# Altium PCB GyroBoard.PcbDoc
Units mil, origin at the board's own origin, x right, y up, seen from the top; angles counter-clockwise.
Board outline 1040 x 955 mil, 2 copper layers (Top Layer, Bottom Layer); 45 components, 30 nets, 204 pads, 65 vias.
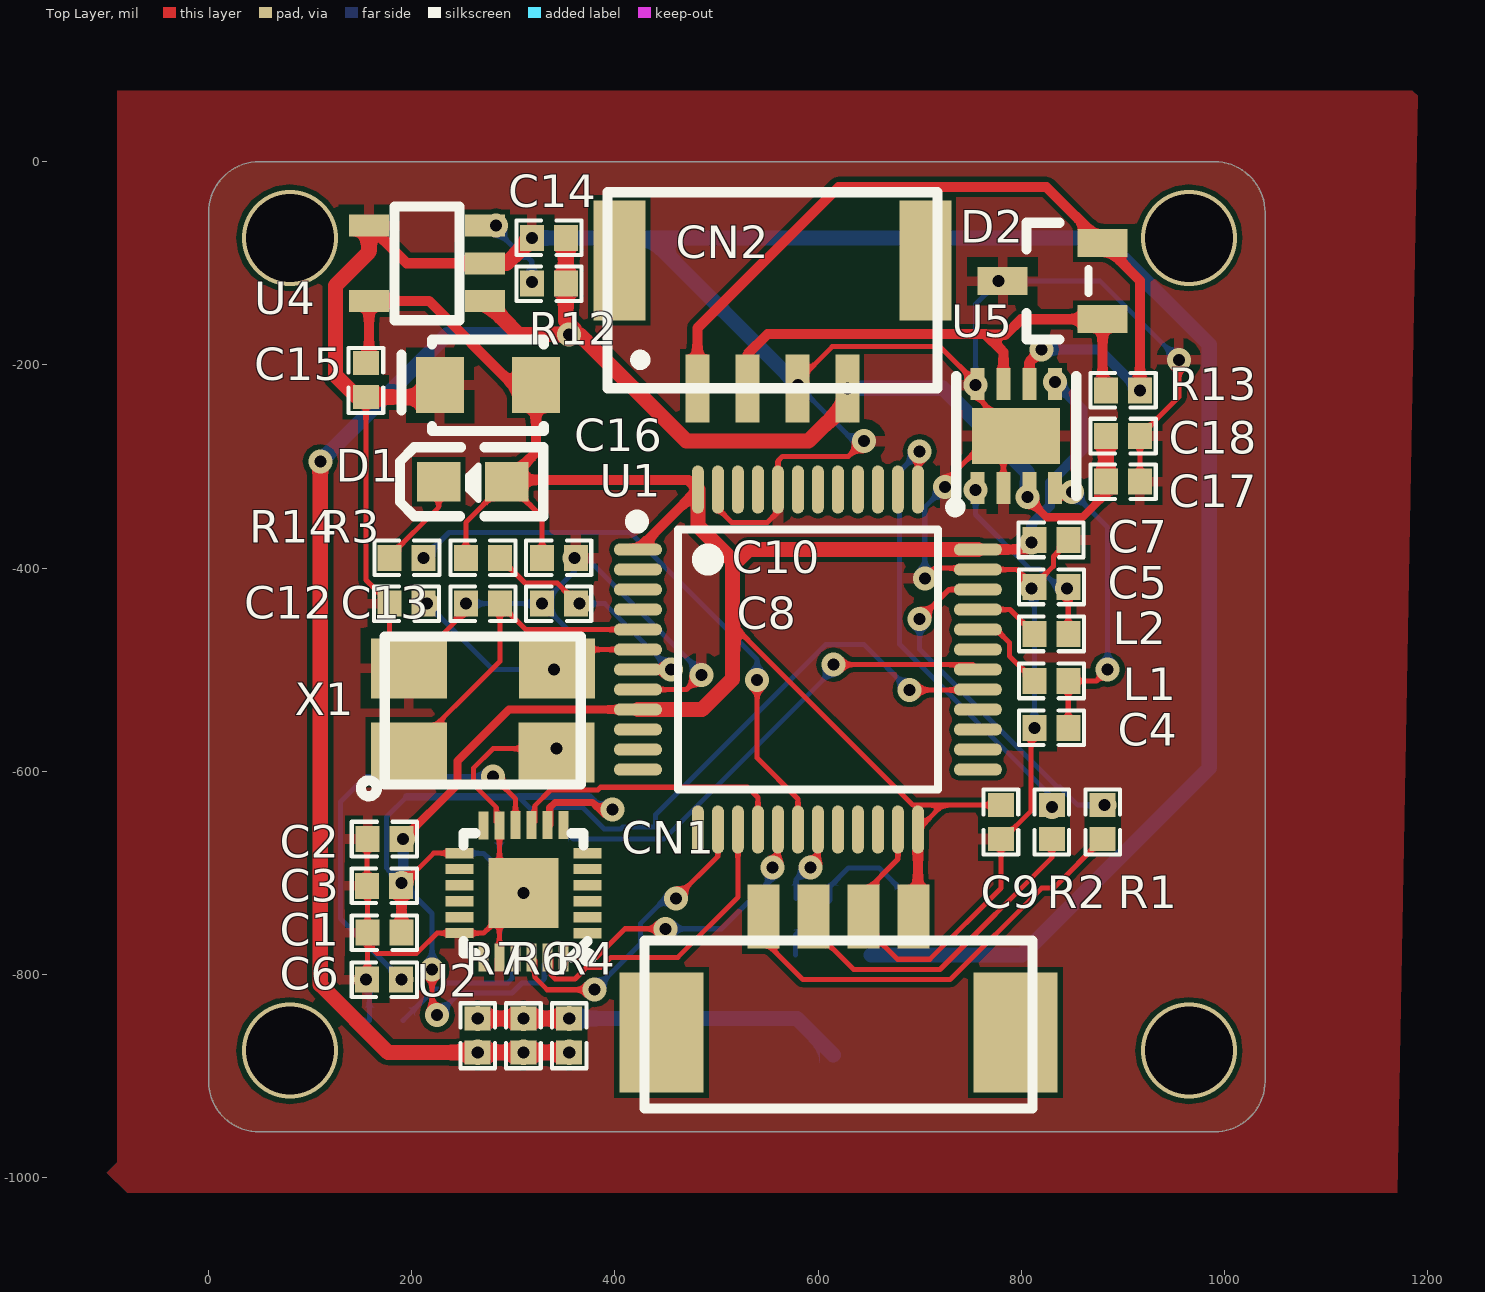
[diagram p0: Top Layer view]
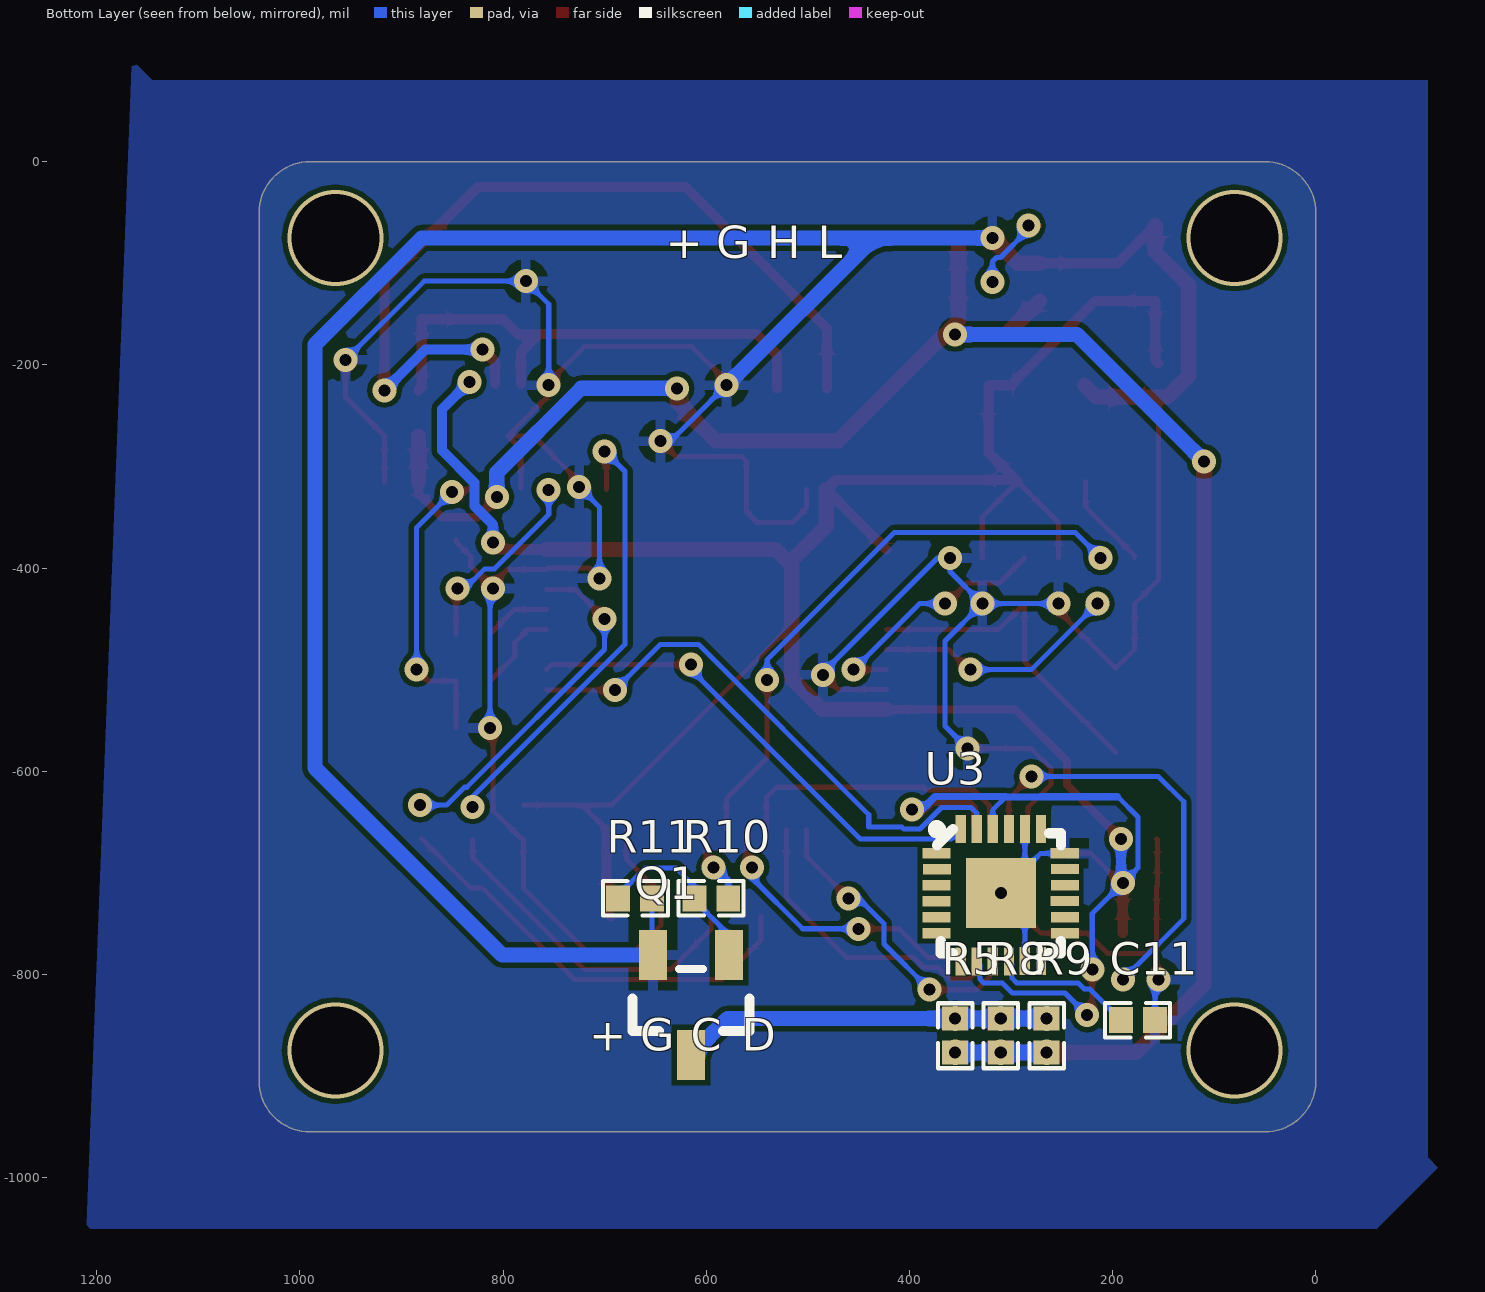
[diagram p1: Bottom Layer view, seen from below]

## Layer stack, top to bottom
Top Solder: solder mask 0.4, Solder Resist, Dk 3.5
Top Layer: signal copper 1.4
Dielectric 1: dielectric 12.6, FR-4, Dk 4.8
Bottom Layer: signal copper 1.4
Bottom Solder: solder mask 0.4, Solder Resist, Dk 3.5

## Board outline
0,-905 ccw(c50,-905) 50,-955 990,-955 ccw(c990,-905) 1040,-905 1040,-50 ccw(c990,-50) 990,0 50,0 ccw(c50,-50) 0,-50

## Design rules (kind name [scope] priority, off if disabled: settings)
Clearance [All] p1: gap=5 ignorepadtopadclearanceinfootprint=TRUE except(0: Arc-Text Arc-Hole Track-Text Track-Hole SMDPad-Text SMDPad-Hole THPad-Text THPad-Hole Via-Text Via-Hole Fill-Text Fill-Hole Poly-Text Poly-Hole Region-Text Region-Hole Text-Text Text-Hole)
ComponentClearance [All] p1: gap=5 collisioncheckmode=3 verticalgap=5 showdistances=FALSE
HoleSize [All] p1: absolutevalues=TRUE maxlimit=248.03 minlimit=7.87 maxpercent=80.000 minpercent=20.000
MinimumSolderMaskSliver [All] p1 off: minsoldermaskwidth=5
PolygonConnect [All] p1: connectstyle=Relief reliefconductorwidth=10 reliefentries=4 polygonreliefangle="90 Angle" airgapwidth=10
RoutingVias [All] p1: holewidth=11.81 width=23.62 viastyle="Through Hole" minholewidth=11.81 minwidth=23.62 maxholewidth=248.03 maxwidth=314.96
SilkToSilkClearance [All] p1 off: silktosilkclearance=10
SilkToSolderMaskClearance [IsPad] p1 off: minsilkscreentomaskgap=10 clearancetoexposedcopper=TRUE
SolderMaskExpansion [All] p1: expansion=4
Width [All] p1: maxlimit=50 minlimit=5 preferedwidth=5
25 further rules are at their usual default settings.

## Components (designator, comment, footprint, x,y, rotation, side; value= is the part's Value field where it differs from the comment)
C1 "105" 0402 173.3,-758.89 r0 top value=22pF
C2 "104" 0402 173.3,-666.67 r0 top value=22pF
C3 "104" 0402 172.7,-712.78 r180 top value=22pF
C4 "47pF" 0402 829.53,-557.32 r180 top value=22pF
C5 "47pF" 0402 829.53,-418.57 r180 top value=22pF
C6 "104" 0402 172.7,-805 r180 top value=22pF
C7 "104" 0402 829.53,-372.32 r0 top value=22pF
C8 "104" 0402 345,-435 r0 top value=22pF
C9 "104" 0402 780,-650 r270 top value=22pF
C10 "104" 0402 345,-390 r0 top value=22pF
C11 "104" 0402 175,-845 r180 bottom value=22pF
C12 "20pF" 0402 195,-435 r0 top value=22pF
C13 "20pF" 0402 270,-435 r180 top value=22pF
C14 "4.7uF" 0402 335,-75 r180 top value=22pF
C15 "104" 0402 155,-215 r90 top value=22pF
C16 "4.7uF" CAP-CASE-A_3216 275,-220 r0 top value=22pF
C17 "1uF" 0402 900,-315 r180 top value=22pF
C18 "104" 0402 900,-270 r180 top value=22pF
CN1 "53261-0471" 532610471 620,-800 r0 top
CN2 "A1257WR-S-4P" A1257WR-S-4P 555,-160 r180 top
D1 "LED_GREEN" LED-0603 260,-315 r0 top
D2 "SM712_C293966" SOT-23-3 830.8,-117.6 r90 top
L1 "CBG100505U310T" 0402 829.53,-511.07 r180 top value=300MA
L2 "CBG100505U310T" 0402 829.53,-464.82 r180 top value=300MA
Q1 "BSS138LT1G" SOT-23(SOT-23-3) 615,-830 r0 bottom
R1 "100R" 0402 880,-650 r270 top value=10K
R2 "100R" 0402 830,-650 r270 top value=10K
R3 "10K" 0402 270,-390 r180 top
R4 "270R" 0402 355,-860 r90 top value=10K
R5 "270R" 0402 355,-860 r90 bottom value=10K
R6 "270R" 0402 310,-860 r90 top value=10K
R7 "270R" 0402 265,-860 r90 top value=10K
R8 "270R" 0402 310,-860 r90 bottom value=10K
R9 "270R" 0402 265,-860 r90 bottom value=10K
R10 "120R" 0402 595,-725 r180 bottom value=10K
R11 "10K" 0402 670,-725 r0 bottom
R12 "4.7K" 0402 335,-120 r180 top value=10K
R13 "120R" 0402 900,-225 r180 top value=10K
R14 "200" 0402 195,-390 r180 top value=10K
U1 "STM32F103C6T7A" QFP-48_LSA9.2-LSB9.2-H1.6-PITCH0.5-TL 590,-490 r0 top
U2 "MPU6500" QFN24-EP 310.05,-718.05 r180 top
U3 "MPU6500" QFN24-EP 310.05,-721.95 r180 bottom
U4 "LP5907MFX-3.3/NOPB" SOT-23-5 215,-100 r90 top
U5 "MCP2562T-E/MF" DFN-8_EP_3X3MM 795,-270 r90 top
X1 "8MHz" SMD-5032_4P 270,-540 r0 top

## Footprints (in the part's own frame and the unit in brackets; to place one, negate y for a bottom-side part, rotate by r counter-clockwise, add the part's x,y. Pads: shape width x height; smd on the part's side, far side on the other; paste and mask are expansions set on the pad)
0402 [mm]
  rect 0.6x0.65 smd: 1(-0.424,0) 2(0.424,0)
  silkscreen extent -0.82,-0.43 0.81,0.43
532610471 [mm]
  rect 2.1x3 smd: 0(-4.425,-1.45) 0(4.425,-1.45)
  rect 0.8x1.6 smd: 1(-1.875,1.45) 2(-0.625,1.45) 3(0.625,1.45) 4(1.875,1.45)
  silkscreen extent -4.85,-3.35 4.85,0.85
A1257WR-S-4P [mm]
  rect 0.6x1.7 smd: 1(1.874,1.6) 2(0.625,1.6) 3(-0.625,1.6) 4(-1.875,1.6)
  rect 1.3x3 smd: 5(3.825,-1.6) 6(-3.825,-1.6)
  silkscreen extent -4.13,-3.3 4.13,1.6
CAP-CASE-A_3216 [mm]
  rect 1.2x1.4 smd: 1(-1.2,0) 2(1.2,0)
  silkscreen extent -2.16,-1.14 1.4,1.14
DFN-8_EP_3X3MM [mm]
  rect 0.8x0.35 smd: 1(-1.3,0.97) 2(-1.3,0.32) 3(-1.3,-0.33) 4(-1.3,-0.97) 5(1.3,-0.97) 6(1.3,-0.33) 7(1.3,0.32) 8(1.3,0.97)
  rect 1.4x2.2 smd: 9(0,0)
  silkscreen extent -1.9,-1.5 1.5,1.65
LED-0603 [mil]
  rect 43x39 smd: 1(33.5,0) 2(-33.5,0)
  silkscreen extent -72,-34 70,34
QFN24-EP [mil]
  rect 27.56x10 smd: 1(-63.05,41.35) 2(-62.95,25.55) 3(-63.05,9.85) 4(-63.05,-5.95) 5(-63.05,-21.75) 6(-63.05,-37.45) 13(63.05,-37.45) 14(63.05,-21.75) 15(62.95,-5.85) 16(63.05,9.85) 17(63.05,25.65) 18(62.95,41.25)
  rect 10x27.56 smd: 7(-39.35,-65.05) 8(-23.65,-65.05) 9(-7.85,-65.05) 10(7.95,-65.05) 11(23.65,-64.95) 12(39.45,-64.95) 19(39.45,65.05) 20(23.75,65.05) 21(7.95,65.05) 22(-7.85,65.05) 23(-23.65,65.05) 24(-39.35,65.05)
  rect 68.9x68.9 smd: 25(0.05,1.95)
  silkscreen extent -67,-57 59,69
QFP-48_LSA9.2-LSB9.2-H1.6-PITCH0.5-TL [mm]
  oval 1.2x0.3 smd: 1(-4.25,2.75) 2(-4.25,2.25) 3(-4.25,1.75) 4(-4.25,1.25) 5(-4.25,0.75) 6(-4.25,0.25) 7(-4.25,-0.25) 8(-4.25,-0.75) 9(-4.25,-1.25) 10(-4.25,-1.75) 11(-4.25,-2.25) 12(-4.25,-2.75) 25(4.25,-2.75) 26(4.25,-2.25) 27(4.25,-1.75) 28(4.25,-1.25) 29(4.25,-0.75) 30(4.25,-0.25) 31(4.25,0.25) 32(4.25,0.75) 33(4.25,1.25) 34(4.25,1.75) 35(4.25,2.25) 36(4.25,2.75)
  oval 0.3x1.2 smd: 13(-2.75,-4.25) 14(-2.25,-4.25) 15(-1.75,-4.25) 16(-1.25,-4.25) 17(-0.75,-4.25) 18(-0.25,-4.25) 19(0.25,-4.25) 20(0.75,-4.25) 21(1.25,-4.25) 22(1.75,-4.25) 23(2.25,-4.25) 24(2.75,-4.25) 37(2.75,4.25) 38(2.25,4.25) 39(1.75,4.25) 40(1.25,4.25) 41(0.75,4.25) 42(0.25,4.25) 43(-0.25,4.25) 44(-0.75,4.25) 45(-1.25,4.25) 46(-1.75,4.25) 47(-2.25,4.25) 48(-2.75,4.25)
  silkscreen extent -4.42,-3.25 3.25,3.6
SMD-5032_4P [mm]
  rect 1.9x1.5 smd: 1(-1.849,-1.05) 2(1.847,-1.05) 3(1.849,1.05) 4(-1.849,1.05)
  silkscreen extent -3.05,-2.15 2.45,1.85
SOT-23(SOT-23-3) [mm]
  rect 0.7x1.25 smd: 1(-0.95,-1.25) 2(0.95,-1.25) 3(0,1.25)
  silkscreen extent -1.46,-0.9 1.46,0.65
SOT-23-3 [mm]
  rect 0.7x1.25 smd: 1(-0.95,-1.25) 2(0.95,-1.25) 3(0,1.25)
  silkscreen extent -1.46,-0.9 1.46,0.65
SOT-23-5 [mil]
  rect 21.7x39.37 smd: 1(-37,-57) 2(0,-57) 3(37,-57) 4(37,57) 5(-37,57)
  silkscreen extent -56,-32 56,32

## Part data
C1 C2 C3 C4 C5 C6 C7 C8 C9 C10 C11 C12 C13 C14 C15 C16 C17 C18: library part Cap, "Capacitor", LatestRevisionDate=17-Jul-2002, LatestRevisionNote="Re-released for DXP Platform.", PackageReference=RAD-0.3, Published=8-Jun-2000, Publisher="Altium Limited"
CN1: BOM_Manufacturer=MOLEX, BOM_Manufacturer Part=53261-0871, BOM_Supplier=LCSC, BOM_Supplier Part=C240848, Contributor=LCSC, spicePre=C
CN2: library part A1257WV-S-4P, BOM_Manufacturer=MOLEX, BOM_Manufacturer Part=53261-0871, BOM_Supplier=LCSC, BOM_Supplier Part=C240848, Contributor=LCSC, spicePre=C
D1: library part LED0, "Typical INFRARED GaAs LED", LatestRevisionDate=08-Jul-2005, LatestRevisionNote="Mech Layer 1 removed.", PackageDescription="LED; 2 Leads", PackageReference=LED-0, Published=8-Jun-2000, Publisher="Altium Limited"
D2: BOM_Manufacturer=DOWO, BOM_Manufacturer Part=SM712, BOM_Supplier=LCSC, BOM_Supplier Part=C293966, Contributor=LCSC, spicePre=D
L1 L2: library part Inductor, Code_IEC=1005, Code_JEITA=0402, LatestRevisionDate=29-May-2009, LatestRevisionNote="IPC-7351 Footprint Added.", PackageDescription="Chip Inductor", PackageReference=0402-A, Published=8-Jun-2000, Publisher="Altium Limited"
Q1: BOM_LCSC Assembly=Yes, BOM_Manufacturer=ON, BOM_Manufacturer Part=BSS138LT1G, BOM_Supplier=LCSC, BOM_Supplier Part=C82045, SMT Type=Extend, spicePre=Q
R1 R2 R3 R4 R5 R6 R7 R8 R9 R10 R11 R12 R13 R14: library part Res2, "Resistor", LatestRevisionDate=17-Jul-2002, LatestRevisionNote="Re-released for DXP Platform.", PackageReference=AXIAL-0.4, Published=8-Jun-2000, Publisher="Altium Limited"
U1: BOM_LCSC Assembly=Yes, BOM_Manufacturer=STMicroelectronics, BOM_Manufacturer Part=STM32F103C6T7A, BOM_Supplier=LCSC, BOM_Supplier Part=C222074, Contributor=LCSC, SMT Type=Extend, spicePre=U
U2 U3: library part MPU6500_1, BOM_Manufacturer=InvenSense, BOM_Manufacturer Part=MPU6500, BOM_Supplier=LCSC, BOM_Supplier Part=C50278, spicePre=U
U4: BOM_LCSC Assembly=Yes, BOM_Manufacturer="Texas Instruments", BOM_Manufacturer Part=LP5907MFX-3.3/NOPB, BOM_Supplier=LCSC, BOM_Supplier Part=C80670, Contributor=LCSC, SMT Type=Extend, spicePre=U
U5: BOM_Manufacturer="Microchip Tech", BOM_Manufacturer Part=MCP2562T-E/MF, BOM_Supplier=LCSC, BOM_Supplier Part=C191416, Contributor=LCSC, spicePre=U
X1: BOM_Manufacturer=TAE, BOM_Manufacturer Part=SMD-5032_4P8M20pf20ppm, BOM_Supplier=LCSC, BOM_Supplier Part=C133333, Contributor=LCSC, nameAlias=Frequency, spicePre=X, spiceSymbolName=SMD-5032_4P8M20PF20PPM

## Via types
v1: diameter 23.62, hole 11.81, Top Layer to Bottom Layer, 55 vias
v2: diameter 25, hole 12, Top Layer to Bottom Layer, 6 vias
v3: diameter 94.49, hole 86.61, Top Layer to Bottom Layer, 3 vias
v4: diameter 94.49, hole 86.6, Top Layer to Bottom Layer, 1 vias

## Nets (pads, with @x,y where several pads share a name; then routed paths per layer and width w, separated by ;. In a path a pad name is that pad's centre, name@x,y a point inside that pad or via, vN(x,y) a via of type N, cw(c..) or ccw(c..) an arc to the next point about the centre after c; other vN are vias at no path point)
3V3: C1.2 C2.2 C3.1 C7.1 C9.1 C10.1 C15.2 C16.2 CN1.4 D1.1 R3.2 U1.1 U1.9 U1.24 U1.36 U1.48 U2.8 U2.13 U3.8 U3.22 U4.5 U5.5 | length 3273.5
  Top Layer w5: C3.1@190,-712.18 221.58,-680.6 U2.13 ; v1(220,-795) 220,-835 v1(225,-840) ; R3.2 253.3,-355.2 D1.1 328.3,-349.8 C10.1 ; 511.49,-451.49 515.69,-455.69 693.3,-633.3 722.29,-633.3 ; U1.24 722.29,-633.3 ; C9.1 722.29,-633.3
  Top Layer w7: U2.8 335.9,-653 335.9,-635.7 340.88,-630.72 377.92,-630.72 389.7,-642.5 394.7,-637.5 v1(397.5,-637.5)
  Top Layer w8: C2.2@191.6,-666.6 245,-613.21 245,-590 295.79,-539.21 U1.9
  Top Layer w10: C15.2 158,-195.3 U4.5 217,-137 300,-220 C16.2 322.24,-286.26 D1.1@295.31,-313.19 ; C1.2 190,-713.38 C3.1 190,-712.18 v1(190,-710) ; D1.1 D1.1@295.31,-313.19 ; U1.1 U1.48 472.24,-313.19 D1.1@295.31,-313.19 ; CN1.4 698.27,-738.47 U1.24 ; U1.36 803.42,-381.73 C7.1
  Top Layer w15: U1.9 485.79,-539.21 515.69,-509.31 515.69,-455.69 515.69,-397.58 518.27,-395 ; U1.48 481.73,-358.46 518.27,-395 ; U1.36 531.54,-381.73 518.27,-395
  Bottom Layer w5: 195,-625 175,-645 175,-695 v1(190,-710) 220,-740 v1(220,-795) ; v1(225,-840) 246.82,-818.18 298.65,-818.18 308.55,-808.28 326.72,-808.28 330.4,-804.6 330.4,-790.3 U3.8 ; 305,-625 317.9,-637.9 U3.22
  Bottom Layer w7: 195,-625 271.28,-625 271.59,-625.31 304.69,-625.31 305,-625 305.38,-624.62 374.62,-624.62 387.5,-637.5 v1(397.5,-637.5) v1@395,-635
  Bottom Layer w10: v1(190,-710) 191.67,-708.33 v1(191.67,-666.67) ; v1(810,-375) 810,-356.95 828.19,-338.76 828.19,-315.97 860,-284.15 860,-243.62 v1(833.19,-216.81)
CAN_H: CN2.2 D2.1 R13.2 U5.7 | length 525.1
  Top Layer w10: CN2.2 530.4,-189.59 550.47,-169.53 764.53,-169.53 765,-170 ; U5.7 782.4,-187.4 765,-170 ; R13.2 880,-221.7 D2.1 800,-155 785,-170 765,-170
CAN_L: CN2.1 D2.2 R13.1 U5.6 | length 850.4
  Top Layer w10: CN2.1 481.2,-163.8 620,-25 824.8,-25 D2.2 916.7,-116.9 v1(916.7,-225) ; U5.6 807.99,-197.01 v1(820,-185)
  Bottom Layer w10: v1(820,-185) 876.7,-185 v1(916.7,-225)
CAN_RX: C4.1 L1.1 U5.4 | length 305.9
  Top Layer w5: U5.4 845,-332.99 850,-327.99 v1(850,-325) ; C4.1 L1.1 873.93,-511.07 v1(885,-500)
  Bottom Layer w5: v1(850,-325) 885,-360 v1(885,-500)
CAN_TX: C5.1 L2.1 U5.1 | length 193.2
  Top Layer w5: v1(755,-322.99) U5.1 ; L2.1 C5.1
  Bottom Layer w5: v1(755,-322.99) 755,-347.31 808.38,-400.69 818,-400.69 837.31,-420 v1(845,-420)
GND: C1.1 C2.1 C3.2 C4.2 C5.2 C6.2 C7.2 C8.1 C9.2 C10.2 C11.2 C12.1 C13.2 C14.2 C15.1 C16.1 C17.1 C18.1 CN1.3 CN2.3 D2.3 Q1.2 R11.1 U1.8 U1.23 U1.35 U1.44 U1.47 U2.11 U2.18 U2.20 U2.25 U3.11 U3.18 U3.20 U3.25 U4.2 U4.4 U5.2 U5.8 U5.9 X1.2 X1.4 | length 6089.8
  Top Layer w5: C15.1 155,-411.7 C12.1 178.3,-479.75 X1.4 253.3,-442.55 v1(253.3,-435) ; C6.2@156.6,-804.4 C1.1@156.6,-769.97 ; C2.1 156,-667.27 C3.2 156.6,-713.38 C1.1 C1.1@156.6,-769.97 ; U2.20 U2.25@286.3,-743.7 ; v1(328.3,-435) C8.1@328.3,-433.19 ; v1(342.7,-577.7) 279.99,-577.7 260.69,-597 260.69,-611.62 260,-612.31 283.1,-635.41 283.1,-649.8 U2.11 286.4,-696.4 v1(310,-720) U2.25@286.3,-743.7 ; U1.8 470.47,-519.53 v1(485,-505) ; U1.47 501.42,-341.42 515,-355 550,-355 560.47,-344.53 U1.44 560.47,-294.53 565,-290 630,-290 v1(645,-275) ; CN2.3@579.6,-216.31 613.89,-182.03 720.02,-182.03 U5.8 756.81,-231.81 U5.9 ; U1.23 678.58,-686.42 644.61,-720.39 CN1.3 644.61,-751.56 678.05,-785 710,-785 780,-715 C9.2 781.81,-666.7 809.7,-638.81 809.7,-557.32 v1(812.83,-557.32) ; v1(705,-410) 715,-400 755.9,-400 U1.35 795.68,-401.42 C5.2@812.13,-417.87 ; v1(725,-320) 725,-315 770,-270 U5.9 ; U5.2 782.4,-282.6 U5.9 ; C5.2@812.83,-416.76 831.31,-398.28 831.73,-398.28 831.73,-388.64 846.23,-374.13 C7.2 ; C17.1 C18.1 955,-231.7 v1(955,-195) ; C1.1@156.6,-769.97 165.82,-779.18 204.92,-779.18 224.8,-759.3 U2.18 270.7,-759.3 U2.25@286.3,-743.7
  Top Layer w10: U4.4 195,-100 U4.2
  Top Layer w15: U4.4 158,-88.79 125,-121.79 125,-210.58 146.12,-231.7 C15.1 216.06,-231.7 C16.1 ; U4.2 293.3,-100 v1(318.3,-75)
  Bottom Layer w5: C11.2@153.3,-855 C11.2@153.3,-845 ; v1(155,-805) 158.3,-808.3 C11.2 ; U3.18 270.7,-680.7 U3.25@286.3,-696.3 ; v1(253.3,-435) v1(328.3,-435) ; U3.20 U3.25@286.3,-696.3 ; U3.11 286.4,-743.6 v1(310,-720) U3.25@286.3,-696.3 ; v1(342.7,-577.7) 365,-555.4 365,-471.7 v1(328.3,-435) ; v1(485,-505) 485,-502.69 372.31,-390 v1(360,-390) 360,-403.3 v1(328.3,-435) ; v1(580,-220) 635,-275 v1(645,-275) ; Q1.2 653.3,-779.9 R11.1 ; v1(705,-410) 705,-340 v1(725,-320) ; v1(755,-220) 755,-140.2 v1(777.6,-117.6) 877.6,-117.6 v1(955,-195) ; v1(810,-420) 812.83,-422.83 v1(812.83,-557.32)
  Bottom Layer w15: v1(318.3,-75) 435,-75 ; v1(580,-220) 435,-75 ; Q1.2 800.8,-780.8 985,-596.6 985,-180 880,-75 435,-75
HEAT_PWM: R10.2 U1.19 | length 78
  Top Layer w5: v1(592.71,-694.61) 599.84,-687.48 U1.19
  Bottom Layer w5: R10.2 578.3,-706.7 590.39,-694.61 v1(592.71,-694.61)
IIC_CLK: U1.29 U3.23 | length 551.7
  Top Layer w5: v1(690,-520) 756.85,-520 U1.29
  Bottom Layer w5: U3.23 333.7,-641.3 339.38,-635.62 368.31,-635.62 389.5,-656.81 405.5,-656.81 407.31,-655 440,-655 440,-642.69 607.69,-475 645,-475 v1(690,-520)
IIC_SDA: U1.30 U3.24 | length 493.8
  Top Layer w5: v1(615,-495) 752.48,-495 U1.30
  Bottom Layer w5: U3.24 359.31,-666.81 448.19,-666.81 619.31,-495.69 618.62,-495 v1(615,-495)
LED_TEST: R14.1 U1.18 | length 574.4
  Top Layer w5: v1(540,-510) 540,-587.01 580.16,-627.17 U1.18
  Bottom Layer w5: v1(211.7,-390) 236.7,-365 415,-365 540,-490 v1(540,-510)
NetC6_1: C6.1 U2.10 | length 417.4
  Top Layer w5: v1(280,-605) 302.1,-627.1 U2.10
  Bottom Layer w5: v1(190,-805) 130,-745 130,-630 155,-605 v1(280,-605)
NetC8_2: C8.2 R3.1 U1.7 | length 242.2
  Top Layer w5: R3.1 311.4,-414.7 343.22,-414.7 C8.2@361.7,-433.19 ; U1.7 422.84,-500 v1(455,-500)
  Bottom Layer w5: v1(365,-435) 390,-435 v1(455,-500)
NetC11_1: C11.1 U3.10 | length 142.4
  Bottom Layer w5: C11.1 222.39,-814.31 228,-814.31 234.13,-808.18 294.51,-808.18 298.9,-803.79 298.9,-790.2 U3.10
NetCN1_1: CN1.1 R1.2 | length 430.5
  Top Layer w5: CN1.1 546.18,-766.18 585,-805 730,-805 820,-715 831.7,-715 R1.2
NetCN1_2: CN1.2 R2.2 | length 327.4
  Top Layer w5: CN1.2 595.39,-755.39 635,-795 720,-795 830,-685 R2.2
NetD1_2: D1.2 R14.2 | length 95
  Top Layer w5: R14.2 178.3,-388.19 226.5,-339.99 D1.2
NetL1_2: L1.2 U1.32 | length 84.2
  Top Layer w5: U1.32 775.47,-460.47 788.44,-473.44 788.44,-486.68 L1.2
NetL2_2: L2.2 U1.33 | length 65.5
  Top Layer w5: U1.33 788.8,-440.79 L2.2
NetQ1_1: Q1.1 R10.1 R11.2 | length 178.6
  Bottom Layer w5: Q1.1 577.6,-760.91 611.7,-726.81 R10.1 611.7,-713.3 630,-695 660,-695 686.7,-721.7 R11.2
NetQ1_3: Q1.3 R4.2 R5.2 R6.2 R7.2 R8.2 R9.2 | length 454.9
  Top Layer w15: v2(265,-843.3) v2(310,-843.3) v2(355,-843.3)
  Bottom Layer w15: v2(265,-843.3) v2(310,-843.3) v2(355,-843.3) 579.1,-843.3 Q1.3
NetR12_2: R12.2 U4.3 | length 85
  Top Layer w5: U4.3 v1(283,-63) ; R12.2 v1(318.3,-118.3)
  Bottom Layer w5: v1(283,-63) 283,-67.01 310.3,-94.31 314.31,-94.31 318.3,-98.3 v1(318.3,-118.3)
OSC_IN: C13.1 U1.5 X1.1 | length 330
  Top Layer w5: X1.1 286.7,-491.85 C13.1 312.17,-460.47 U1.5
OSC_OUT: C12.2 U1.6 X1.3 | length 242.8
  Top Layer w5: C12.2 v1(215,-435) ; X1.3 361.29,-480.16 U1.6
  Bottom Layer w5: v1(215,-435) 280,-500 v1(340,-500)
SPI_MISO: U1.16 U2.9 | length 283.4
  Top Layer w5: U2.9 321.2,-649.7 321.2,-633.8 336.62,-618.38 383.21,-618.38 385.9,-615.69 530.69,-615.69 540.79,-625.79 U1.16
SPI_MOSI: U1.17 U2.24 | length 287.9
  Top Layer w5: U2.24 381.9,-783.1 410,-755 v1(450,-755) ; v1(555,-694.61) 560.47,-689.14 U1.17
  Bottom Layer w5: v1(450,-755) 505,-755 555,-705 v1(555,-694.61)
SPI_NSS: U1.14 U2.22 | length 298.8
  Top Layer w5: U2.22 321.2,-786.4 321.2,-802.82 333.38,-815 v1(380,-815) ; v1(460,-725) 501.42,-683.58 U1.14
  Bottom Layer w5: v1(380,-815) 425,-770 425,-750 450,-725 v1(460,-725)
SPI_SCK: U1.15 U2.23 | length 306
  Top Layer w5: U2.23 336.9,-783.1 336.9,-800 341.29,-804.38 360.62,-804.38 371.9,-793.1 386.04,-793.1 396.04,-783.1 461.9,-783.1 521.1,-723.9 U1.15
SWCLK: R2.1 U1.37 | length 458.8
  Top Layer w5: U1.37 698.27,-286.73 v1(700,-285)
  Bottom Layer w5: v1(700,-285) 680,-305 680,-475 830,-625 v1(830,-635)
SWDIO: R1.1 U1.34 | length 346.2
  Top Layer w5: v1(700,-450) 728.9,-421.1 U1.34 ; R1.1 v1(881.7,-633.3)
  Bottom Layer w5: v1(700,-450) 700,-480 835.69,-615.69 838,-615.69 855.61,-633.3 v1(881.7,-633.3)
VCC_5V_INPUT: C14.1 C17.2 C18.2 CN2.4 R4.1 R5.1 R6.1 R7.1 R8.1 R9.1 R12.1 U4.1 U5.3 | length 2114.7
  Top Layer w8: U5.3 807.99,-332.99 825,-350 860,-350 883.3,-326.7 C17.2
  Top Layer w15: v1(110,-295) 110,-810 176.7,-876.7 v2(265,-876.7) v2(310,-876.7) v2(355,-876.7) ; U4.1 305,-170 v1(355,-170) ; C14.1 R12.1 351.7,-156.44 360.13,-164.87 v1(355,-170) ; v1(628.81,-222.99) 628.81,-236.74 590.55,-275 470.26,-275 365.26,-170 v1(355,-170) ; C17.2 C18.2
  Bottom Layer w15: v1(110,-295) 235,-170 v1(355,-170) ; v2(265,-876.7) v2(310,-876.7) v2(355,-876.7) ; v1(628.81,-222.99) 722.99,-222.99 806.1,-306.1 v1(806.1,-330)
pads on no net: CN1.0 CN2.5 CN2.6 U1.2 U1.3 U1.4 U1.10 U1.11 U1.12 U1.13 U1.20 U1.21 U1.22 U1.25 U1.26 U1.27 U1.28 U1.31 U1.38 U1.39 U1.40 U1.41 U1.42 U1.43 U1.45 U1.46 U2.1 U2.2 U2.3 U2.4 U2.5 U2.6 U2.7 U2.12 U2.14 U2.15 U2.16 U2.17 U2.19 U2.21 U3.1 U3.2 U3.3 U3.4 U3.5 U3.6 U3.7 U3.9 U3.12 U3.13 U3.14 U3.15 U3.16 U3.17 U3.19 U3.21
copper on no net:
  other v3: 80,-875 965,-875 80,-75
  other v4: 965,-75

## Polygon pours and split planes (outlines as drawn)
GND on Bottom Layer "GND_L02_P008" (solid, remove dead copper, pour order 8): 1210,-1050 -60,-1050 -120,-990 -110,-980 -110,80 1145,80 1165,100
GND on Top Layer "GND_L01_P012" (solid, remove dead copper, pour order 12): 1170,-1015 -80,-1015 -100,-995 -90,-985 -90,70 1185,70 1190,65

## Silkscreen, mask and mechanical layers (free items; w line width, h text height)
Bottom Overlay:
  text "L" at 490,-95 h32
  text "H" at 540,-95 h32
  text "G" at 590,-95 h32
  text "+" at 640,-95 h32
  text "D" at 565,-875 h32
  text "C" at 615,-875 h32
  text "G" at 665,-875 h32
  text "+" at 715,-875 h32
Mechanical 1:
  the board outline again, w10